# Altium PCB keypad.PcbDoc
Units mm, origin at the board's own origin, x right, y up, seen from the top; angles counter-clockwise.
Board outline 121.92 x 71.12 mm, 2 copper layers (Top Layer, Bottom Layer); 23 components, 14 nets, 144 pads, 11 vias.
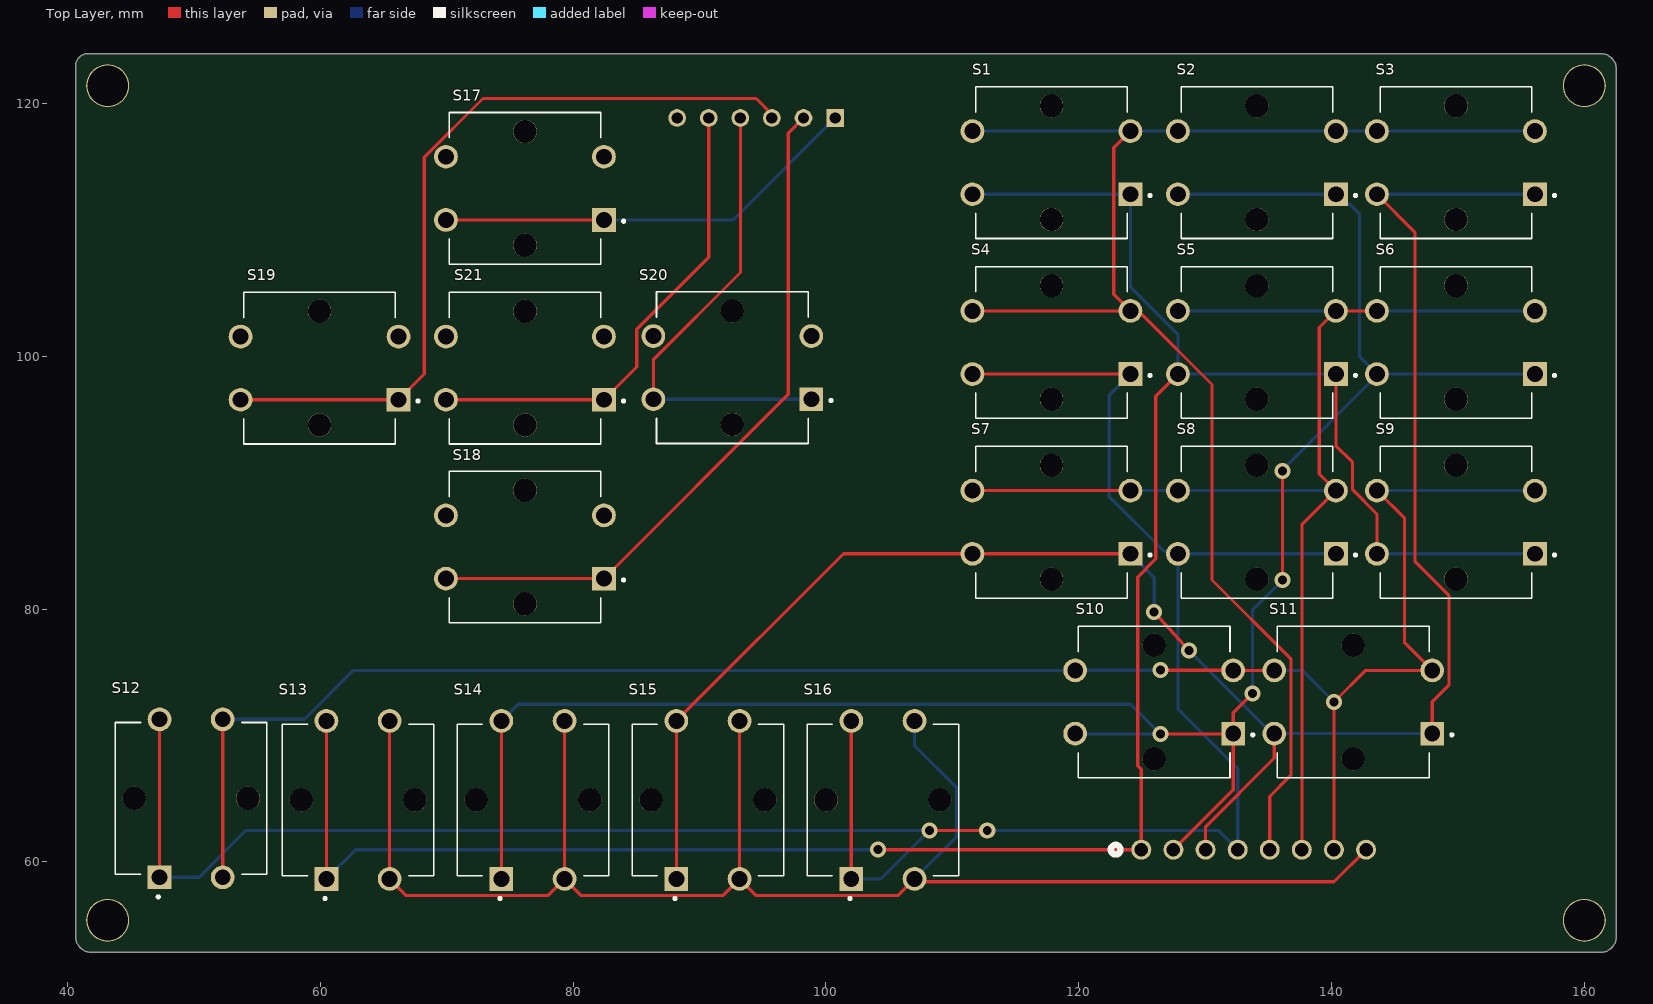
[diagram p0: Top Layer view]
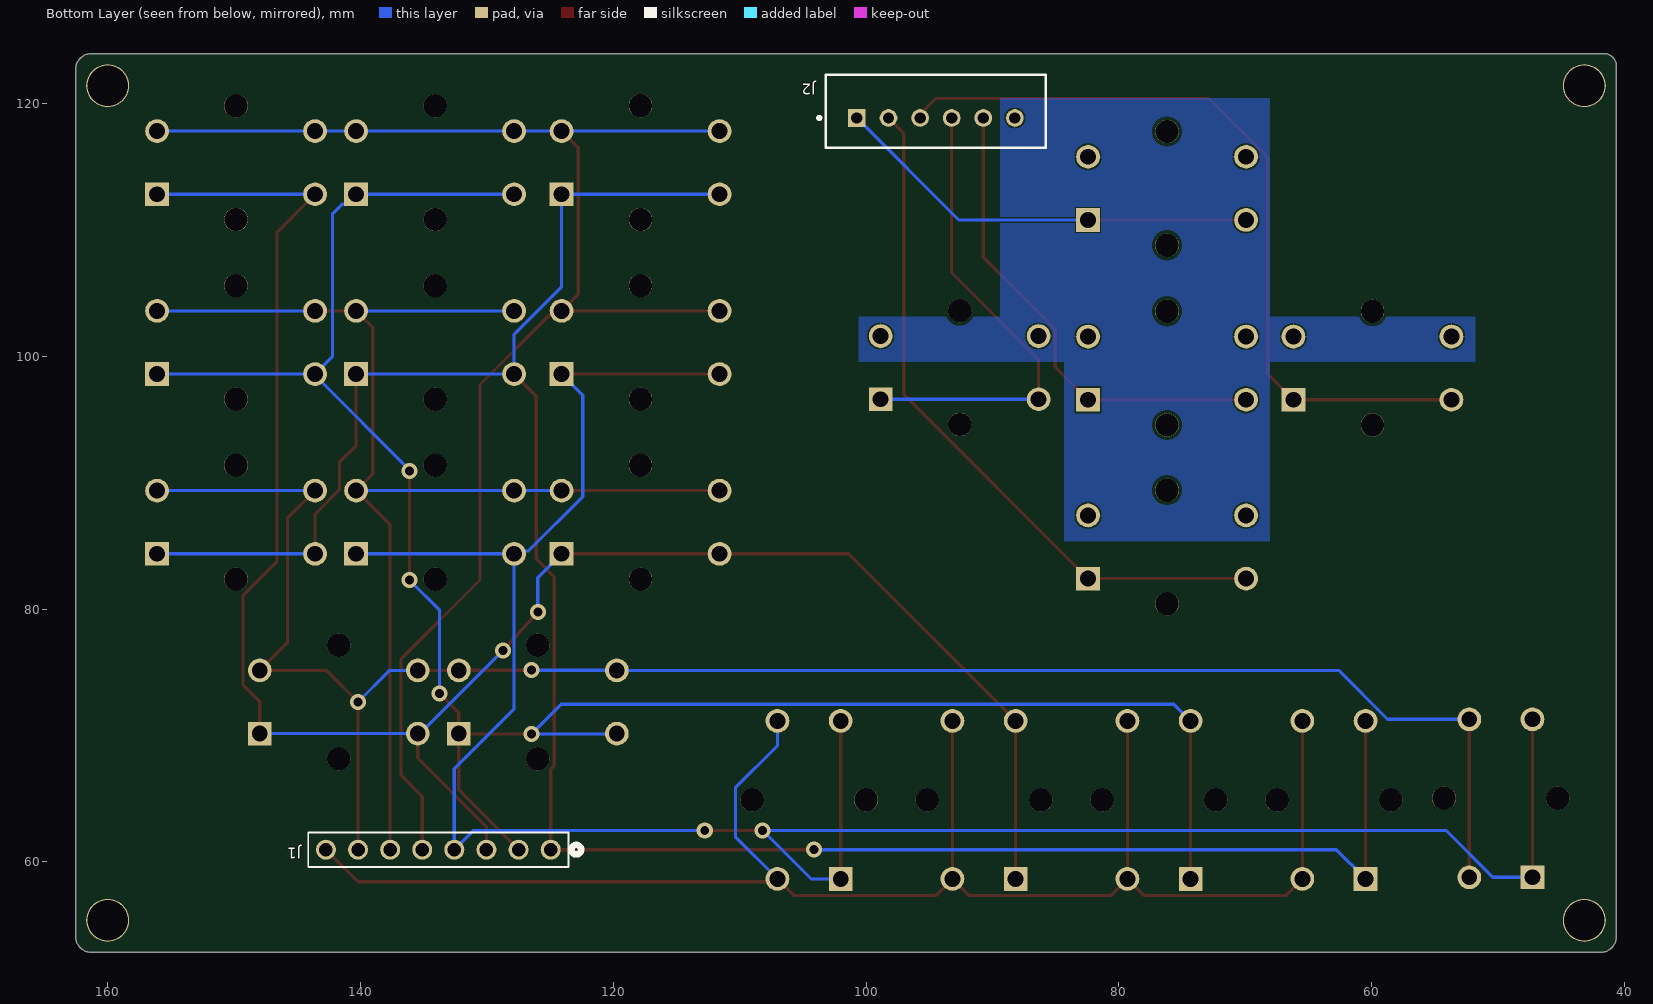
[diagram p1: Bottom Layer view, seen from below]
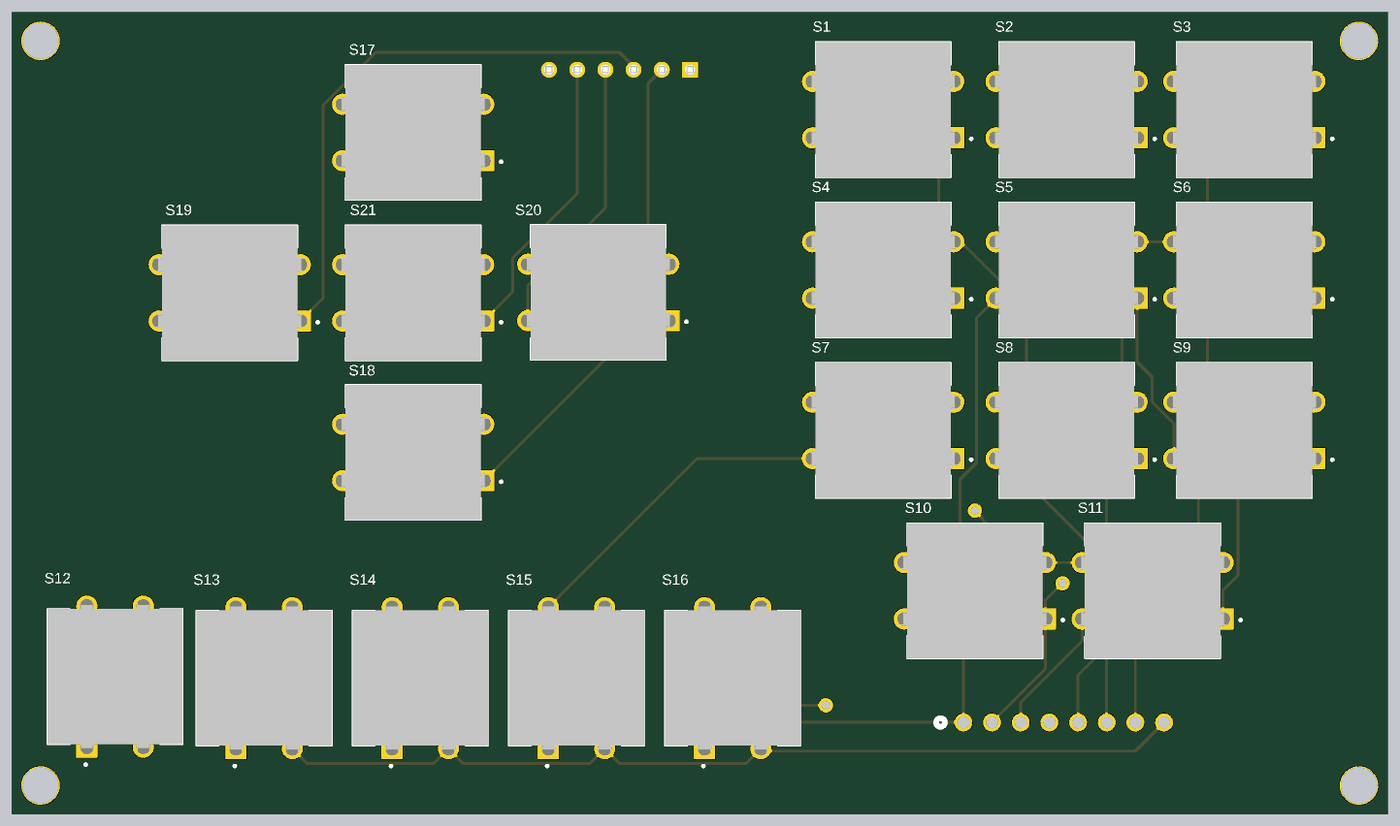
[diagram p2: 3D render of the assembled board from above, using the file's embedded part models]

## Layer stack, top to bottom
Top Solder: solder mask 0.0102, Solder Resist, Dk 3.5
Top Layer: signal copper 0.0356
Dielectric 1: dielectric 0.32, FR-4, Dk 4.8
Bottom Layer: signal copper 0.0356
Bottom Solder: solder mask 0.0102, Solder Resist, Dk 3.5

## Board outline
40.64,54.102 40.64,122.936 cw(c41.656,122.936) 41.656,123.952 161.29,123.952 cw(c161.29,122.682) 162.56,122.682 162.56,54.102 cw(c161.29,54.102) 161.29,52.832 41.91,52.832 cw(c41.91,54.102)

## Design rules (kind name [scope] priority, off if disabled: settings)
BoardOutlineClearance [All] p1: gap=0.2 ignorepadtopadclearanceinfootprint=FALSE
Clearance [All] p1: gap=0.127 ignorepadtopadclearanceinfootprint=FALSE except(0.25: Arc-Hole Track-Hole SMDPad-Hole THPad-Hole Via-Hole Fill-Hole Poly-Hole Region-Hole Text-Hole)
ComponentClearance [All] p1: gap=0.127 collisioncheckmode=3 verticalgap=0.127 showdistances=TRUE
DiffPairsRouting [All] p1: maxlimit=0.254 minlimit=0.127 mostfreqgap=0.127 toplayer_minwidth=0.127 toplayer_maxwidth=25.4 toplayer_prefwidth=0.127 bottomlayer_minwidth=0.127 bottomlayer_maxwidth=25.4 bottomlayer_prefwidth=0.127 maxuncoupledlength=12.7
Height [All] p1: minheight=0 maxheight=1816.048 prefheight=12.7
HoleSize [All] p1: absolutevalues=TRUE maxlimit=6.3 minlimit=0.3 maxpercent=80.000 minpercent=20.000
HoleToHoleClearance [All] p1: gap=0.25 allowstackedmicrovias=FALSE
MinimumAnnularRing [All] p1: minimumring=0.076
MinimumSolderMaskSliver [All] p1: minsoldermaskwidth=0
PlaneClearance [All] p1: clearance=0.127
PlaneConnect PlaneConnectPowerPads [InPadClass('PowerPads')] p1: planeconnectstyle=Direct reliefexpansion=0.508 reliefentries=4 reliefconductorwidth=0.254 reliefairgap=0.254
PlaneConnect [All] p2: pad.planeconnectstyle=Relief pad.reliefexpansion=0.3 pad.reliefentries=4 pad.reliefconductorwidth=0.127 pad.reliefairgap=0.127 via.planeconnectstyle=Direct via.reliefexpansion=0.3 via.reliefentries=4 via.reliefconductorwidth=0.127 via.reliefairgap=0.127
PolygonConnect PolygonConnectPowerPads [All vs (InPadClass('PowerPads'))] p1: connectstyle=Direct reliefconductorwidth=0.254 reliefentries=4 polygonreliefangle="90 Angle" airgapwidth=0.254
PolygonConnect [All] p2: thpad.connectstyle=Relief thpad.reliefconductorwidth=0.127 thpad.reliefentries=4 thpad.polygonreliefangle="90 Angle" thpad.airgapwidth=0.127 smdpad.connectstyle=Relief smdpad.reliefconductorwidth=0.127 smdpad.reliefentries=4 smdpad.polygonreliefangle="90 Angle" smdpad.airgapwidth=0.127 via.connectstyle=Direct via.reliefconductorwidth=0.127 via.reliefentries=4 via.polygonreliefangle="90 Angle" via.airgapwidth=0.127
RoutingVias [All] p1: holewidth=0.3 width=0.6 viastyle="Through Hole" minholewidth=0.3 minwidth=0.6 maxholewidth=0.6 maxwidth=6.6
SilkToSilkClearance [All] p1: silktosilkclearance=0
SilkToSolderMaskClearance [IsPad] p1: minsilkscreentomaskgap=0.127 clearancetoexposedcopper=TRUE
SolderMaskExpansion [All] p1: expansion=0.075 istentingtop=FALSE
SupplyNets "Schematic Supply Nets" [InNet('GND')] p1: voltage=0.000
Width [All] p1: maxlimit=25.4 minlimit=0.127 preferedwidth=0.127 minimp=50.000000 maximp=50.000000 favimp=50.000000
20 further rules are at their usual default settings.

## Classes and differential pairs
component class keypad: J1 J2 S1 S2 S3 S4 S5 S6 S7 S8 S9 S10 S11 S12 S13 S14 S15 S16 S17 S18 S20

## Components (designator, comment, footprint, x,y, rotation, side; value= is the part's Value field where it differs from the comment)
J1 "22284085" CONN_SD-42375-001_M295_08_MOL 124.968,60.96 r180 bottom
J2 "B6B-XH-A(LF)(SN)" FP-B6B-XH-A_LF_SN-MFG 94.488,119.38 r180 bottom
S1 "1" SW_B3F-4050 117.856,115.316 r180 top
S2 "2" SW_B3F-4050 134.112,115.316 r180 top
S3 "3" SW_B3F-4050 149.86,115.316 r180 top
S4 "4" SW_B3F-4050 117.856,101.092 r180 top
S5 "5" SW_B3F-4050 134.112,101.092 r180 top
S6 "6" SW_B3F-4050 149.86,101.092 r180 top
S7 "7" SW_B3F-4050 117.856,86.868 r180 top
S8 "8" SW_B3F-4050 134.112,86.868 r180 top
S9 "9" SW_B3F-4050 149.86,86.868 r180 top
S10 "0" SW_B3F-4050 125.984,72.644 r180 top
S11 "dot" SW_B3F-4050 141.732,72.644 r180 top
S12 "A" SW_B3F-4050 49.784,65.024 r90 top
S13 "B" SW_B3F-4050 62.992,64.897 r90 top
S14 "C" SW_B3F-4050 76.835,64.897 r90 top
S15 "D" SW_B3F-4050 90.678,64.897 r90 top
S16 "E" SW_B3F-4050 104.521,64.897 r90 top
S17 "UP" SW_B3F-4050 76.2,113.284 r180 top
S18 "DOWN" SW_B3F-4050 76.2,84.908 r180 top
S19 "LEFT" SW_B3F-4050 59.944,99.06 r180 top
S20 "RIGHT" SW_B3F-4050 92.61,99.1 r180 top
S21 "OK" SW_B3F-4050 76.2,99.06 r180 top

## Footprints (in the part's own frame and the unit in brackets; to place one, negate y for a bottom-side part, rotate by r counter-clockwise, add the part's x,y. Pads: shape width x height; smd on the part's side, far side on the other; paste and mask are expansions set on the pad)
CONN_SD-42375-001_M295_08_MOL [mil]
  round 62 hole 42: 1(0,0) 2(-100,0) 3(-200,0) 4(-300,0) 5(-400,0) 6(-500,0) 7(-600,0) 8(-700,0)
  silkscreen extent -755,-54 95,54
FP-B6B-XH-A_LF_SN-MFG [mm]
  rect 1.4x1.4 hole 0.9 paste-2539.97 mask+0: 1(-6.25,-0.525)
  round 1.4 hole 0.9 paste-2539.97 mask+0: 2(-3.75,-0.525) 3(-1.25,-0.525) 4(1.25,-0.525) 5(3.75,-0.525) 6(6.25,-0.525)
  silkscreen extent -9.35,-2.88 8.7,2.88, body extent -8.7,-2.98 8.7,2.88, height 7
SW_B3F-4050 [mm]
  rect 1.875x1.875 hole 1.25: 1(-6.25,2.5)
  round 1.875 hole 1.25: 2(6.25,2.5) 3(-6.25,-2.5) 4(6.25,-2.5)
  round 1.85 hole 1.85 unplated: ""(0,4.5) ""(0,-4.5)
  silkscreen extent -7.9,-6 6,6, body extent -6.9,-6 6.9,6, height 10

## Part data
J1: library part CMP-007-000000-1, Package=None, Availability=Unavailable, Component Type=Standard, Design Item ID=22284085, MP=22284085, Pin Count=8, Price=None, Source=22284085.SchLib
J2: library part CMP-17439-000076-1, "CONN HEADER VERT 6POS 2.5MM"
S1 S2 S3 S4 S5 S6 S7 S8 S9 S10 S11 S12 S13 S14 S15 S16 S17 S18 S19 S20 S21: library part CMP-011-00013-1, "Tactile Switch SPST-NO Top Actuated Through Hole", Case/Package=None, Availability=Unavailable, Component Type=Standard, Design Item ID=B3F-4050, MF="Omron Electronics", MP=B3F-4050, Pins=4, Price=None, SnapEDA_Link=https://www.snapeda.com/parts/B3F-4050/Omron%20Electronics%20Inc-EMC%20Div/view-part/274265/?ref=snap, Source=B3F-4050.SchLib

## Free pads (board coordinates)
  round 3.4 hole 3.2: 1(43.18,121.412) 2(160.02,121.412) 3(43.18,55.372) 4(160.02,55.372)

## Via types
v1: diameter 1.27, hole 0.711, Top Layer to Bottom Layer, 11 vias

## Nets (pads, with @x,y where several pads share a name; then routed paths per layer and width w, separated by ;. In a path a pad name is that pad's centre, name@x,y a point inside that pad or via, vN(x,y) a via of type N, cw(c..) or ccw(c..) an arc to the next point about the centre after c; other vN are vias at no path point)
GND: J2.6 S17.3 S17.4 S18.3 S18.4 S19.3 S19.4 S20.3 S20.4 S21.3 S21.4 | length 0.1
  Bottom Layer w0.254: S21.3 S21.3@82.47,101.58 ; S20.4@86.34,101.58 S20.4
NetJ1_1: J1.1 S1.1 S1.2 S5.1 S5.2 S9.1 S9.2 S13.1 S13.2 | length 185.9
  Top Layer w0.254: S13.1 S13.2 ; v1(104.14,60.96) J1.1 124.968,67.313 124.678,67.603 124.678,82.526 126.115,83.963 126.115,96.845 S5.2 ; S5.1 140.362,92.918 141.68,91.6 141.68,89.433 143.61,87.503 S9.2
  Bottom Layer w0.254: S13.1 62.805,60.96 v1(104.14,60.96) ; S1.2 S1.1 124.106,105.483 127.862,101.727 S5.2 S5.1 ; S9.2 S9.1
NetJ1_2: J1.2 S2.1 S2.2 S6.1 S6.2 S10.1 S10.2 S14.1 S14.2 | length 163.8
  Top Layer w0.254: S14.1 S14.2 ; v1(126.492,70.104) 132.194,70.104 S10.1 ; J1.2 132.234,65.686 S10.1 ; v1(133.757,73.305) 132.234,71.782 S10.1 ; v1(136.144,82.296) v1(136.144,90.932)
  Bottom Layer w0.254: S14.2 75.653,72.466 124.13,72.466 v1(126.492,70.104) 126.472,70.124 119.754,70.124 S10.2 ; S2.2 S2.1 141.158,112.02 141.472,112.02 142.24,111.252 142.24,99.962 S6.2 ; v1(133.757,73.305) 133.757,79.909 v1(136.144,82.296) ; v1(136.144,90.932) 136.144,91.029 143.61,98.495 S6.2 ; S6.1 S6.2
NetJ1_3: J1.3 S3.1 S3.2 S7.1 S7.2 S11.1 S11.2 S15.1 S15.2 | length 154.9
  Top Layer w0.254: S15.1 S15.2 101.399,84.368 S7.2 S7.1 ; v1(125.984,79.756) v1(128.751,76.708) ; J1.3 130.048,62.782 135.482,68.216 S11.2 ; S3.2 146.61,109.816 146.61,83.771 149.3,81.081 149.3,73.982 147.982,72.663 S11.1
  Bottom Layer w0.254: S7.1 125.984,82.49 v1(125.984,79.756) ; v1(128.751,76.708) 135.315,70.144 S11.1 ; S3.2 S3.1
NetJ1_4: J1.4 S4.1 S4.2 S8.1 S8.2 S12.1 S12.2 S16.1 S16.2 | length 188.3
  Top Layer w0.254: S12.1 S12.2 ; S16.1 S16.2 ; v1(108.204,62.484) v1(112.776,62.484) ; S4.2 S4.1
  Bottom Layer w0.254: S12.1 50.419,58.774 54.129,62.484 v1(108.204,62.484) 104.367,58.647 S16.1 ; v1(112.776,62.484) 131.064,62.484 J1.4 132.588,67.376 127.862,72.102 S8.2 ; S4.1 122.428,96.914 122.428,88.9 126.733,84.595 127.635,84.595 S8.2 ; S8.1 S8.2
NetJ1_5: J1.5 S1.3 S1.4 S2.3 S2.4 S3.3 S3.4 S4.3 S4.4 | length 121.3
  Top Layer w0.254: S4.4 S4.3 ; S1.3 122.787,116.498 122.787,104.911 S4.3 ; J1.5 135.128,65.168 136.8,66.84 136.8,76.052 130.556,82.296 130.556,97.763 125.037,103.282 124.416,103.282 S4.3
  Bottom Layer w0.254: S1.4 S1.3 S2.4 S2.3 S3.4 S3.3
NetJ1_6: J1.6 S5.3 S5.4 S6.3 S6.4 S7.3 S7.4 S8.3 S8.4 | length 101.8
  Top Layer w0.254: S7.4 S7.3 ; J1.6 137.668,86.674 S8.3 139.043,90.687 139.043,102.274 S5.3 S6.4
  Bottom Layer w0.254: S7.3 S8.4 S8.3 ; S5.4 S5.3 ; S6.4 S6.3
NetJ1_7: J1.7 S9.3 S9.4 S10.3 S10.4 S11.3 S11.4 S12.3 S12.4 | length 152.1
  Top Layer w0.254: S12.3 S12.4 ; v1(126.492,75.184) 126.512,75.164 132.214,75.164 S10.3 S11.4 ; J1.7 v1(140.208,72.644) 142.708,75.144 S11.3 145.796,77.33 145.796,87.182 S9.4
  Bottom Layer w0.254: S12.4 58.754,71.274 62.624,75.144 S10.4 119.754,75.164 126.472,75.164 v1(126.492,75.184) ; S11.4 137.708,75.144 v1(140.208,72.644) ; S9.4 S9.3
NetJ1_8: J1.8 S13.3 S13.4 S14.3 S14.4 S15.3 S15.4 S16.3 S16.4 | length 134.4
  Top Layer w0.254: S13.4 S13.3 66.811,57.329 78.017,57.329 S14.3 ; S14.4 S14.3 ; S15.4 S15.3 ; J1.8 140.208,58.42 107.248,58.42 S16.3 105.703,57.329 94.497,57.329 S15.3 ; S14.3 80.654,57.329 91.86,57.329 S15.3
  Bottom Layer w0.254: S16.3 110.35,61.976 110.35,65.856 107.021,69.185 S16.4
NetJ2_1: J2.1 S17.1 S17.2 | length 34.1
  Top Layer w0.254: S17.2 S17.1
  Bottom Layer w0.254: S17.1 92.667,110.784 J2.1
NetJ2_2: J2.2 S18.1 S18.2 | length 55.5
  Top Layer w0.254: S18.2 S18.1 97.028,96.986 97.028,117.645 J2.2
NetJ2_3: J2.3 S19.1 S19.2 | length 62.8
  Top Layer w0.254: S19.2 S19.1 68.23,98.596 68.23,115.75 72.877,120.396 94.488,120.396 95.738,119.146 J2.3
NetJ2_4: J2.4 S20.1 S20.2 | length 37.6
  Top Layer w0.254: S20.2 86.36,99.735 93.253,106.628 93.253,118.84 J2.4
  Bottom Layer w0.254: S20.2 S20.1
NetJ2_5: J2.5 S21.1 S21.2 | length 38.2
  Top Layer w0.254: S21.2 S21.1 85.041,99.151 85.041,102.146 90.738,107.843 J2.5
pads on no net: S1. S2. S3. S4. S5. S6. S7. S8. S9. S10. S11. S12. S13. S14. S15. S16. S17. S18. S19. S20. S21.

## Polygon pours and split planes (outlines as drawn)
GND on Bottom Layer "GND_L02_P000" (solid, pour order 0): 89.408,120.396 89.408,103.124 100.584,103.124 100.584,99.568 84.328,99.568 84.328,85.344 68.072,85.344 68.072,99.568 51.816,99.568 51.816,103.124 68.072,103.124 68.072,120.396

## Silkscreen, mask and mechanical layers (free items; w line width, h text height)
Mechanical 1:
  the board outline again, w0.254